# EAGLE board digital_module (EAGLE 7.4.0)
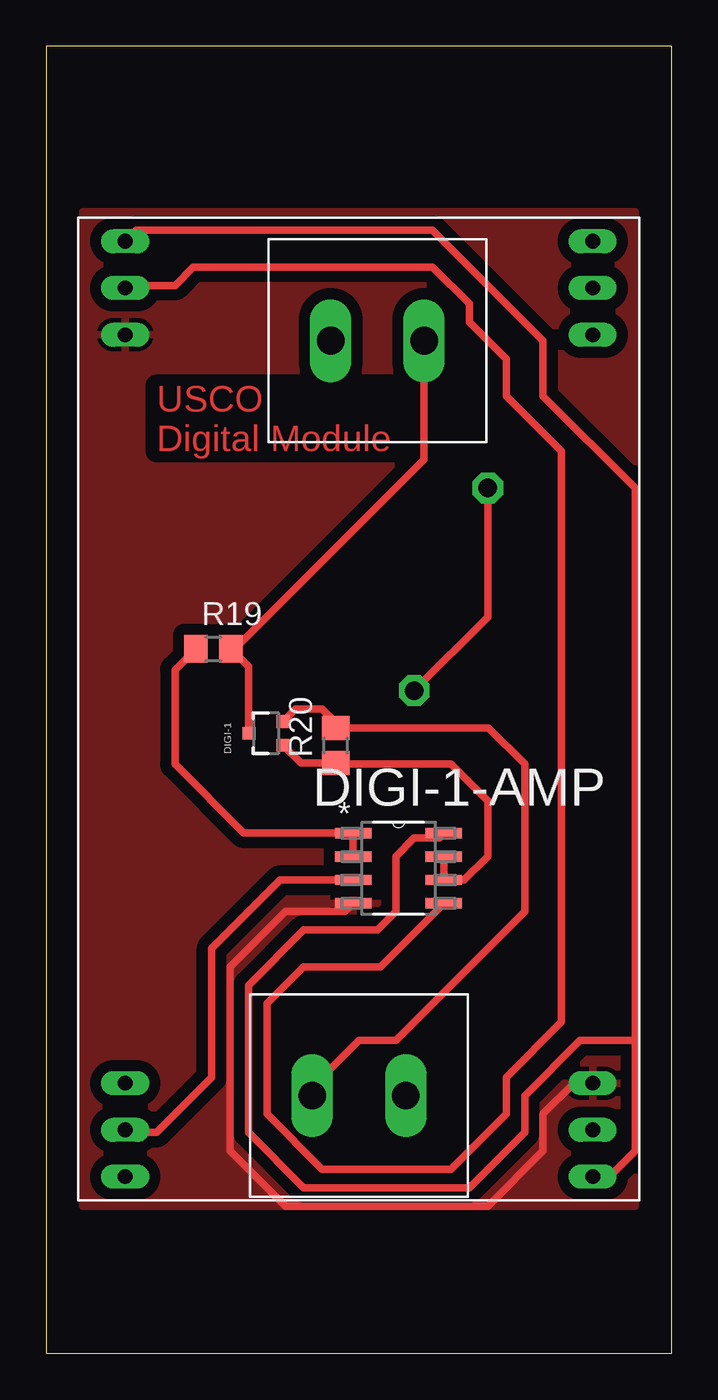
[diagram p0: board, top side]
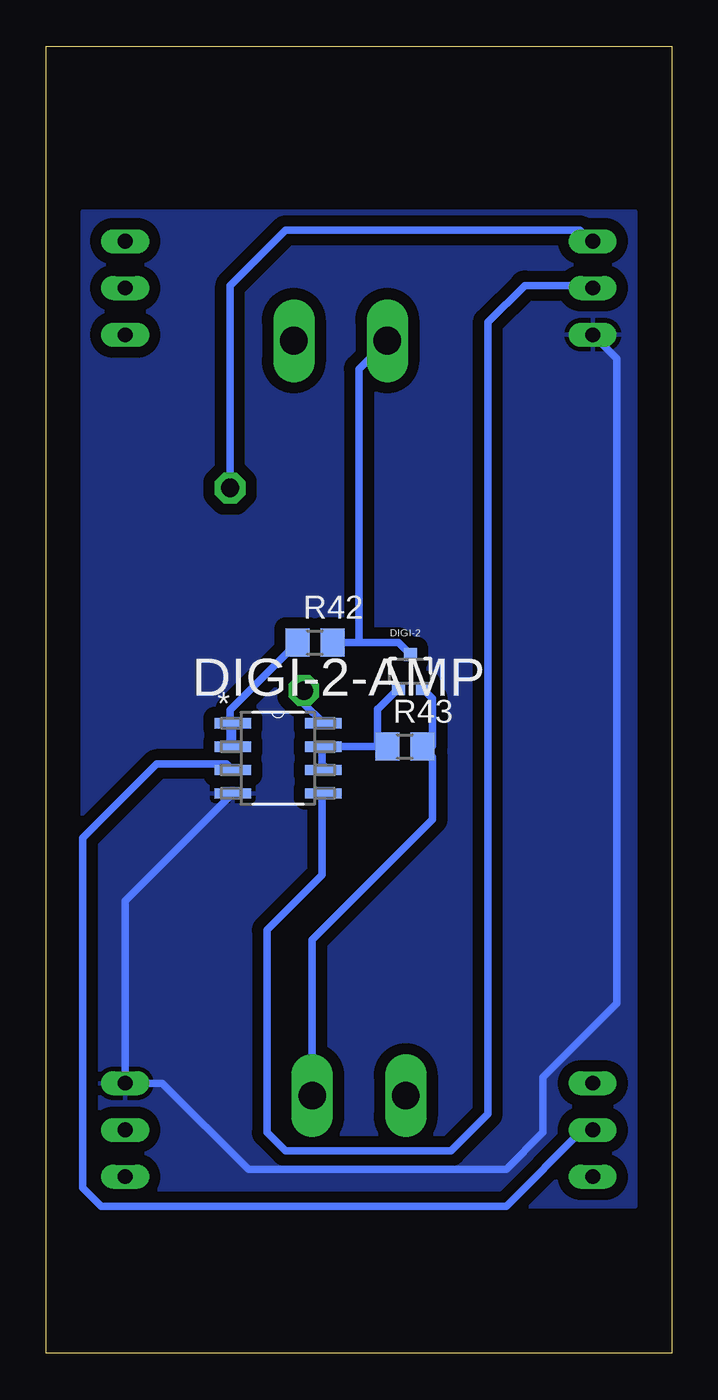
[diagram p1: board, bottom side, seen from below]

Size 34 x 71 mm. Coordinates in mm from the lower left corner, seen from the top.
Outline: 0,0 34,0 34,71 0,71 0,0
Copper layers (1*16): Top 0.035mm / dielectric 1.5mm / Bottom 0.035mm
Design rules "default": minimum track width 10mil, minimum drill 24mil, track to track 8mil, track to pad 8mil, pad to pad 8mil, via to via 8mil, smd to smd 8mil, copper to edge 40mil, drill to drill 8mil, minimum pad ring 10mil, minimum via ring 8mil, stop-mask expansion 4mil, vias tented up to drill 0mil, thermal gap 10mil

## Footprints (pad centres in the part's own frame; a part is rotated, then mirrored left to right if it is on the bottom)
SOT323 = smd 0.7 x 0.7: 1 -0.65,-0.925; 2 0.65,-0.925; 3 0,0.925
SOIC127P600X175-8N = smd 1.981 x 0.559: 1 -2.464,1.905; 2 -2.464,0.635; 3 -2.464,-0.635; 4 -2.464,-1.905; 5 2.464,-1.905; 6 2.464,-0.635; 7 2.464,0.635; 8 2.464,1.905
R0805 = smd 1.3 x 1.5: 1 -0.95,0; 2 0.95,0
MODULE_CONNECTOR = drill 0.8 long: P$1 -25.4,12.7; P$2 -22.86,12.7; P$3 -20.32,12.7; P$4 -25.4,-12.7; P$5 -22.86,-12.7; P$6 -20.32,-12.7; P$7 25.4,12.7; P$8 22.86,12.7; P$9 20.32,12.7; P$10 25.4,-12.7; P$11 22.86,-12.7; P$12 20.32,-12.7
10KPL508 = drill 1.5 long: P$5 -2.54,0; P$6 2.54,0

## Placement (x,y rotation side)
DIGI-1  MOSFET-NCHANNEL2N7002PW  [SOT323]  11.96,33.68 90 top
DIGI-1-AMP  LM358DR  [SOIC127P600X175-8N]  19.15,26.35 0 top
DIGI-2  MOSFET-NCHANNEL2N7002PW  [SOT323]  14.21,37.04 0 bottom
DIGI-2-AMP  LM358DR  [SOIC127P600X175-8N]  21.4,32.32 0 bottom
R19  10k  [R0805]  9.09,38.26 0 top
R20  10k  [R0805]  15.74,33.01 90 top
R42  10k  [R0805]  19.39,38.61 0 bottom
R43  10k  [R0805]  14.51,32.96 0 bottom
U$1  MODULE_CONNECTOR  [MODULE_CONNECTOR]  17,35 90 top
U$2  5.08PITCHTERMINAL  [10KPL508]  18,55 180 top
U$3  5.08PITCHTERMINAL  [10KPL508]  17,14 180 top

## Library data of the parts
DIGI-1 DIGI-2 = SparkFun-DiscreteSemi; PROD_ID: TRANS-11151
DIGI-1-AMP DIGI-2-AMP = Texas Instruments_By_element14_Batch_1; MPN: LM358DR; OC_FARNELL: 1831865; OC_NEWARK: 34K7599; PACKAGE: SOIC-8; SUPPLIER: Texas Instruments
R19 R20 R42 R43 = rcl
U$1 = UADIVOLECO_module_connector
U$2 U$3 = ruuviliitin_2pin

## Nets
DI-1: DIGI-1-AMP.1 DIGI-1-AMP.2 R19.1
DIGI_HIGH_1: DIGI-1.3 R19.2 U$2.P$5
DIGI_HIGH_2: DIGI-2.3 R42.2 U$2.P$6
DIGI_HIGH_REF: DIGI-1-AMP.3 DIGI-2-AMP.3 U$1.P$2
DIGI_LOW_1: DIGI-1.2 R20.2 U$3.P$6
DIGI_LOW_2: DIGI-2.2 R43.2 U$3.P$5
DIGI_LOW_REF: DIGI-1-AMP.5 DIGI-2-AMP.5
GND: DIGI-1-AMP.4 DIGI-2-AMP.4 U$1.P$6 U$1.P$9
N$8: DIGI-1-AMP.6 DIGI-1-AMP.7 DIGI-1.1 R20.1
N$18: U$1.P$10
N$19: U$1.P$3
N$63: DIGI-2-AMP.1 DIGI-2-AMP.2 R42.1
N$64: DIGI-2-AMP.6 DIGI-2-AMP.7 DIGI-2.1 R43.1
NC: U$1.P$11
NC1: U$1.P$1
VCC: DIGI-1-AMP.8 DIGI-2-AMP.8 U$1.P$4 U$1.P$7
VDD: U$1.P$12

## Tracks (layer width: path | path; a pad name or v marks a point on that pad's centre or on a via)
DI-1
  Top 0.406: DIGI-1-AMP.2 DIGI-1-AMP.1 10.74,28.25 7,32 7,37.12 R19.1
DIGI_HIGH_1
  Top 0.406: DIGI-1.3 11,33.72 11,37.3 R19.2 10,38.22 10,38 20.54,48.54 U$2.P$5
DIGI_HIGH_2
  Bottom 0.406: DIGI-2.3 14.86,38.61 17,38.61 | 17,38.61 R42.2 | U$2.P$6 17,53.46 17,38.61
DIGI_HIGH_REF
  Top 0.406: U$1.P$2 4.44,12 6,12 9,15 9,22 12.71,25.71 DIGI-1-AMP.3
  Bottom 0.406: DIGI-2-AMP.3 24.18,32 28,32 32,28 32,9 31,8 9,8 4.86,12.14 U$1.P$2
DIGI_LOW_1
  Top 0.406: 16,34 15.96,33.96 R20.2 | DIGI-1.2 13.55,35 15,35 15.74,34.26 R20.2 | R20.2 24.04,33.96 26,32 26,24 19,17 17,17 14.46,14.46 U$3.P$6
DIGI_LOW_2
  Bottom 0.406: DIGI-2.2 13,35.55 13,33 13.04,32.96 R43.2 13,32.4 13,29 19.54,22.46 U$3.P$5
DIGI_LOW_REF  (1 unrouted)
  Top 0.406: DIGI-1-AMP.5 18.17,21 14,21 12,19 12,13 15,10 22,10 25,13 25,15 28,18 28,49 25,52 25,54 23,56 23,57 21,59 8,59 7,58 4,58
  Bottom 0.406: DIGI-2-AMP.5 19,30.35 19,26 22,23 22,12 21,11 12,11 10,13 10,56 8,58 4,58
GND
  Top 0.406: DIGI-1-AMP.4 16.24,24 13,24 10,21 10,11 13,8 24,8 27,11 27,13 28.68,14.68 U$1.P$6
  Bottom 0.406: DIGI-2-AMP.4 29.7,24.58 U$1.P$6 | U$1.P$9 3,54.02 3,19 7,15 7,12 9,10 23,10 27.68,14.68 U$1.P$6 | 28.68,14.68 U$1.P$6
  pour Bottom (isolate 0.61): 2,62 2,8 32,8 32,62
  pour Top (isolate 0.61): 2,8 32,8 32,62 2,62
N$8
  Top 0.406: DIGI-1-AMP.7 DIGI-1-AMP.6 22.71,25.71 24,27 24,30 22,32 15.8,32 R20.1 | 15.71,32.03 R20.1 | DIGI-1.1 13.86,32.06 R20.1
N$63
  Bottom 0.406: DIGI-2-AMP.2 DIGI-2-AMP.1 23.86,33.14 24,33 24,34.95 R42.1
N$64
  Bottom 0.406: DIGI-2-AMP.6 18.94,31.94 19,32 19,32.89 DIGI-2-AMP.7 16.05,32.95 16,33 | DIGI-2.1 15.98,35 16,35 16,33 | 16,33 15.96,32.96 R43.1
VCC  (via drill 1 pad 1.68)
  Top 0.406: U$1.P$7 4.9,61 21,61 27,55 27,52 32,47 32,17 | 32,17 32,11 30.6,9.6 U$1.P$4 | DIGI-1-AMP.8 21.36,28 20,28 19,27 19,24 18,23 14,23 11,20 11,12 14,9 23,9 26,12 26,14 29,17 32,17 | v20,36 24,40 v24,47
  Bottom 0.406: DIGI-2-AMP.8 20,35.29 v20,36 | v24,47 24,58 21,61 5,61 4.4,60.4 U$1.P$7

## Text on the board
Top: USCO / Digital Module